# EAGLE board TPS799 (EAGLE 9.5.2)
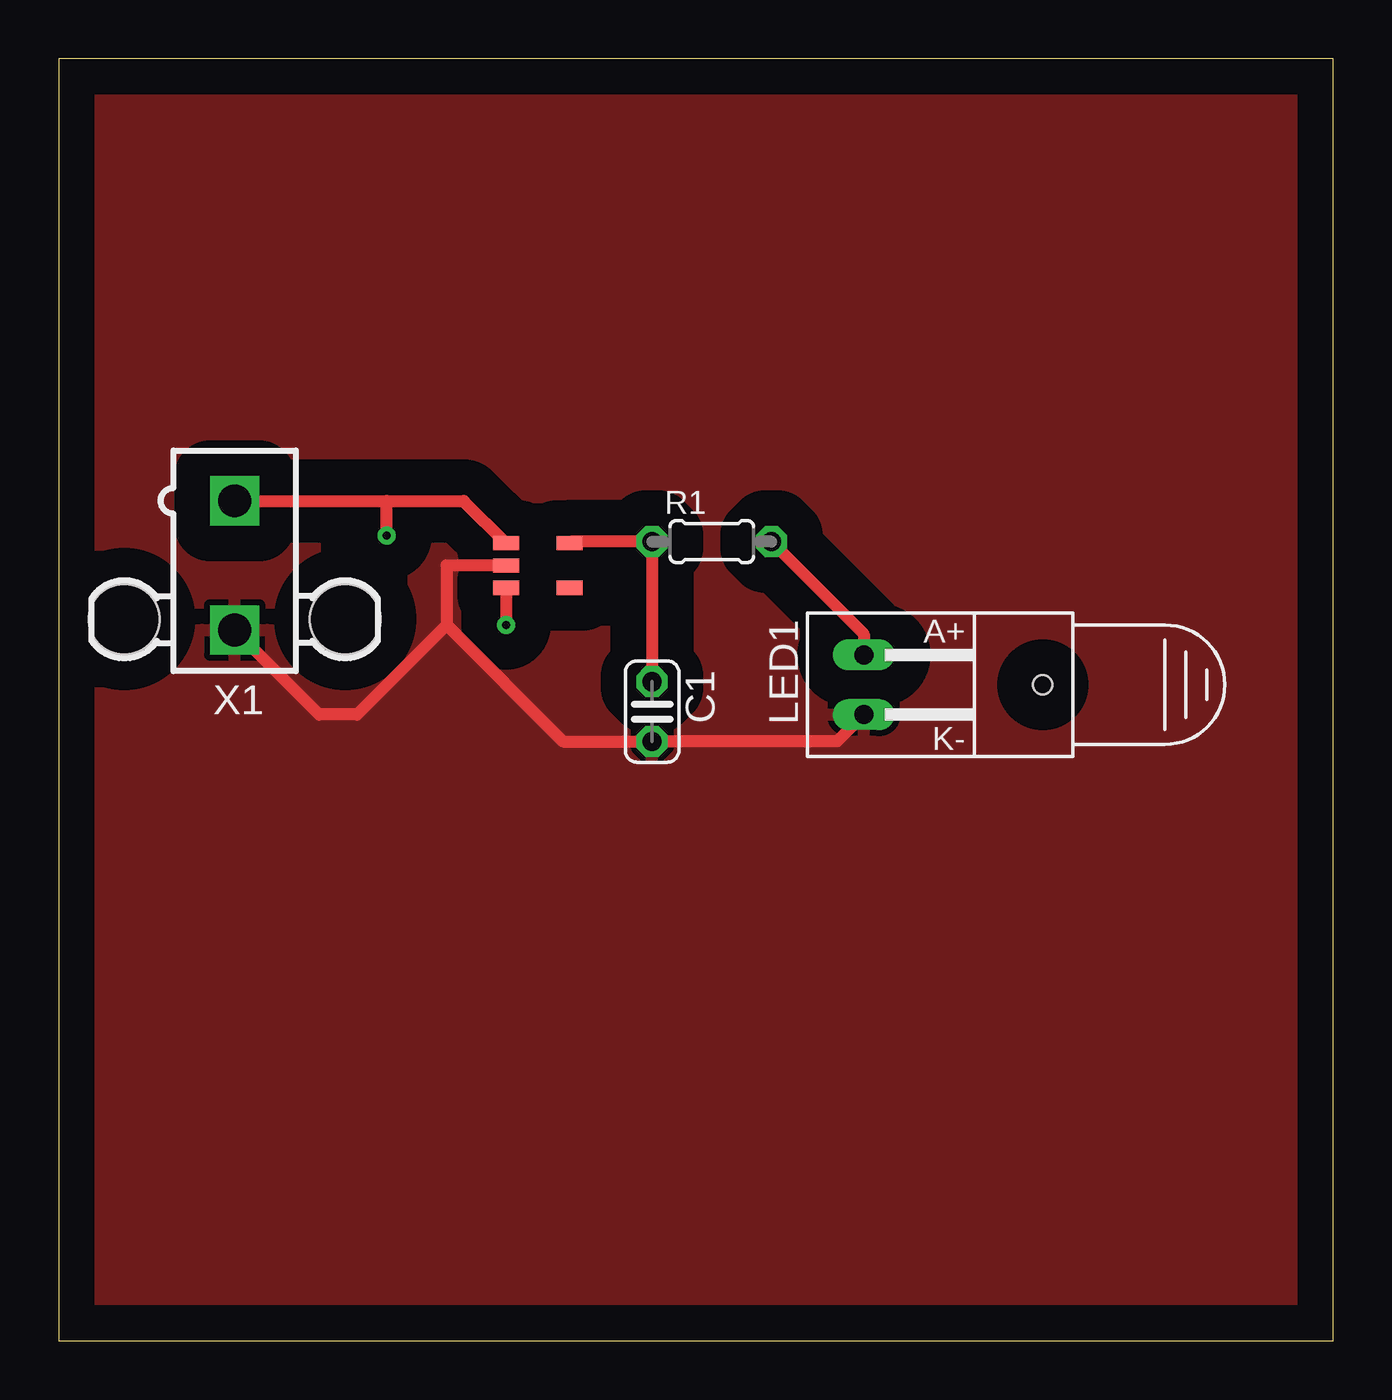
[diagram p0: board, top side]
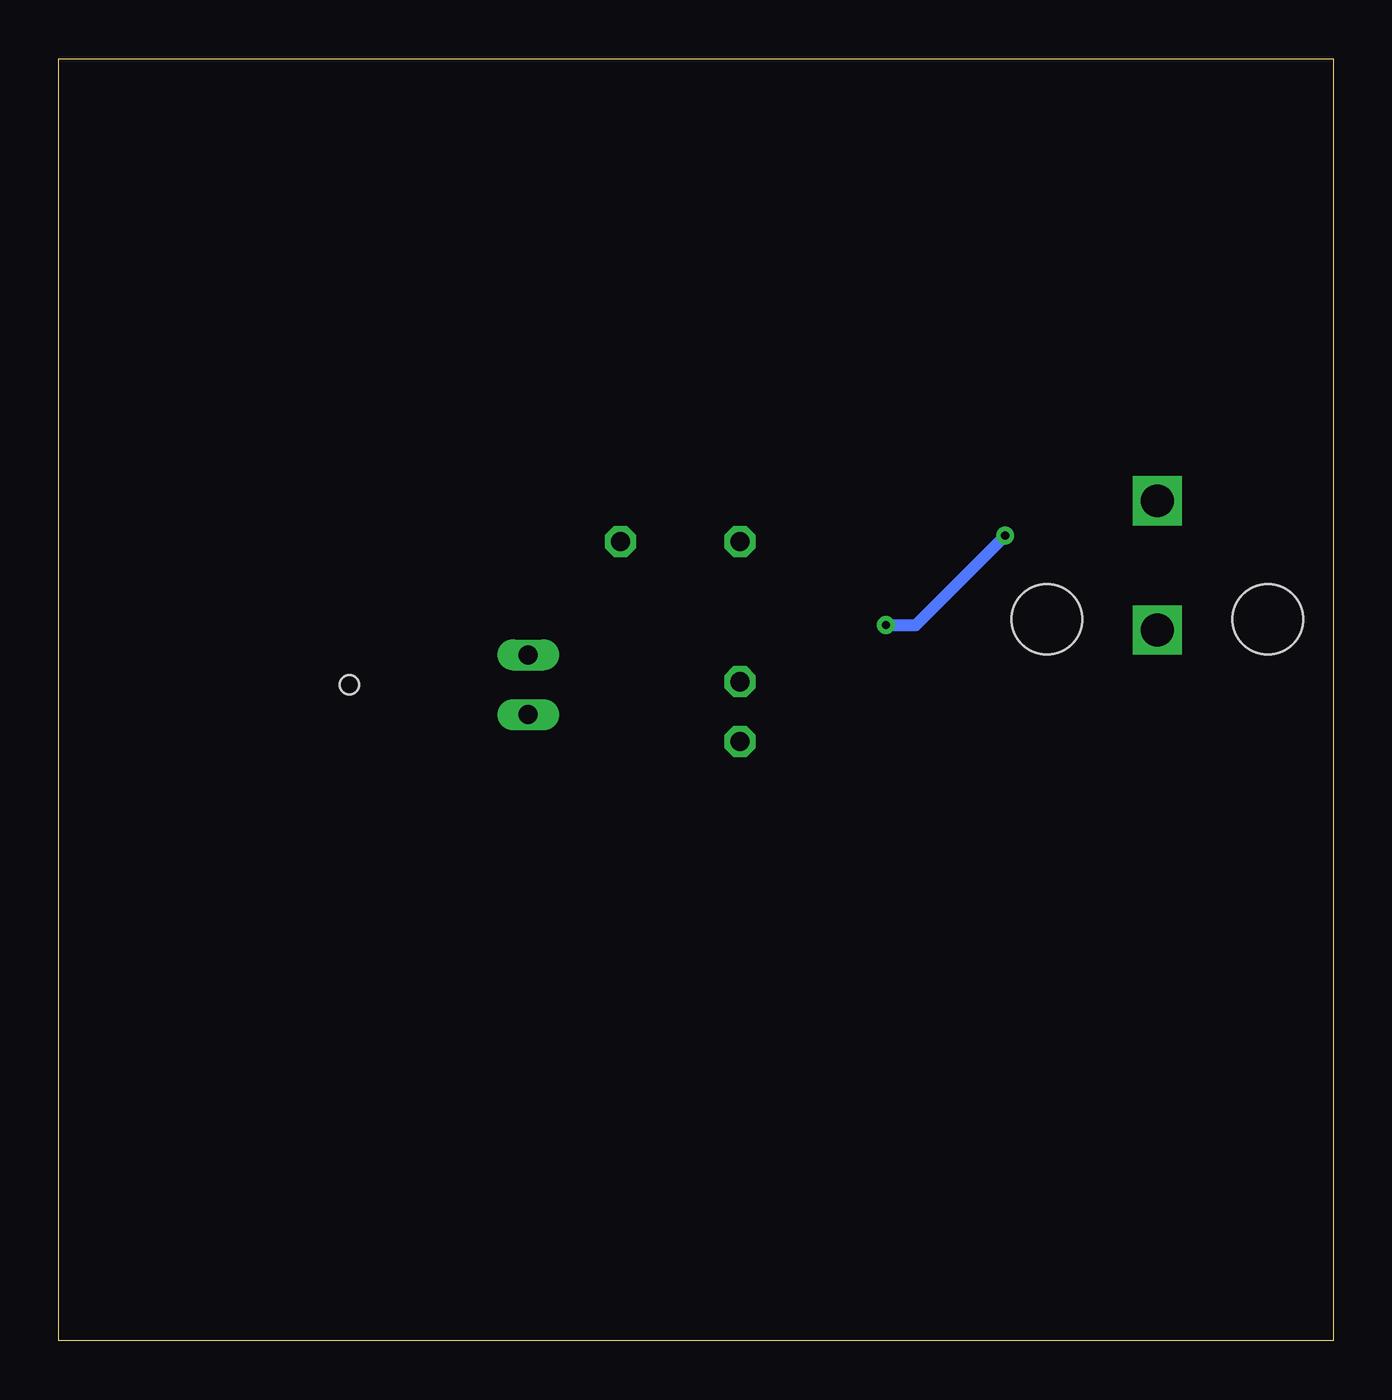
[diagram p1: board, bottom side, seen from below]

Size 54.28 x 54.6 mm. Coordinates in mm from the lower left corner, seen from the top.
Outline: 0,0 54.28,0 54.28,54.6 0,54.6 0,0
Copper layers (1*16): Top 0.035mm / dielectric 1.5mm / Bottom 0.035mm
Design rules "default": minimum track width 6mil, minimum drill 0.35mm, track to track 6mil, track to pad 6mil, pad to pad 6mil, via to via 6mil, smd to smd 6mil, copper to edge 40mil, drill to drill 6mil, minimum pad ring 10mil, minimum via ring 8mil, stop-mask expansion 4mil, vias tented up to drill 0mil, thermal gap 10mil

## Footprints (pad centres in the part's own frame; a part is rotated, then mirrored left to right if it is on the bottom)
C025-024X044 = drill 0.813 octagon: 1 -1.27,0; 2 1.27,0
Q62902-B155 = drill 0.813 long: A 7.62,-1.27; K 7.62,1.27 | hole 0.813: 0,0
0204/5 = drill 0.813 octagon: 1 -2.54,0; 2 2.54,0
TPS799 = smd 1.1 x 0.6: EN 0,-0.95; GND 0,0; IN 0,0.95; NR 2.7,-0.95; OUT 2.7,0.95
5566-2 = drill 1.4 square: 1 0,-2.75; 2 0,2.75 | hole 3: 4.7,2.29; -4.7,2.29

## Placement (x,y rotation side)
C1  2.2uF  [C025-024X044]  25.27,26.8 270 top
LED1  [Q62902-B155]  41.91,27.94 180 top
R1  100ohm  [0204/5]  27.81,34.04 0 top
U$1  TPS799  [TPS799]  19.05,33.02 0 top
X1  5566-2  [5566-2]  7.49,33.02 180 top

## Library data of the parts
C1 = rcl; SPICEPREFIX: C
LED1 = led
R1 = rcl; SPICEPREFIX: R
U$1 = tps799
X1 = con-molex; MF: MOLEX; OC_FARNELL: 1822072; OC_NEWARK: unknown

## Nets
GND: C1.2 LED1.K U$1.GND X1.2
N$1: U$1.EN U$1.IN X1.1
N$2: C1.1 R1.1 U$1.OUT
N$3: LED1.A R1.2

## Tracks (layer width: path | path; a pad name or v marks a point on that pad's centre or on a via)
GND
  Top 0.508: LED1.K 33.15,25.53 C1.2 21.46,25.53 16.51,30.48 | X1.2 11.09,26.67 12.7,26.67 16.51,30.48 | U$1.GND 16.51,33.02 16.51,30.48
  pour Top (isolate 1.524): 0,54.61 0,0 54.61,0 54.61,54.61
N$1  (via drill 0.35)
  Top 0.508: X1.1 13.97,35.77 | 13.97,35.77 17.25,35.77 U$1.IN | U$1.EN v19.05,30.48 | v13.97,34.29 13.97,35.77
  Bottom 0.508: v19.05,30.48 17.78,30.48 v13.97,34.29
N$2
  Top 0.508: C1.1 R1.1 21.82,34.04 U$1.OUT
N$3
  Top 0.508: R1.2 34.29,30.1 LED1.A